# Altium PCB NEW_UI.PcbDoc (part 3 of 4)
Units mm, origin at the board's own origin, x right, y up, seen from the top; angles counter-clockwise.
Board outline 100 x 100 mm, 4 copper layers (SIG/PWR1, GND1, GNS2, SIG/PWR2), stack 1.17 mm thick; 240 components, 215 nets, 917 pads, 445 vias.
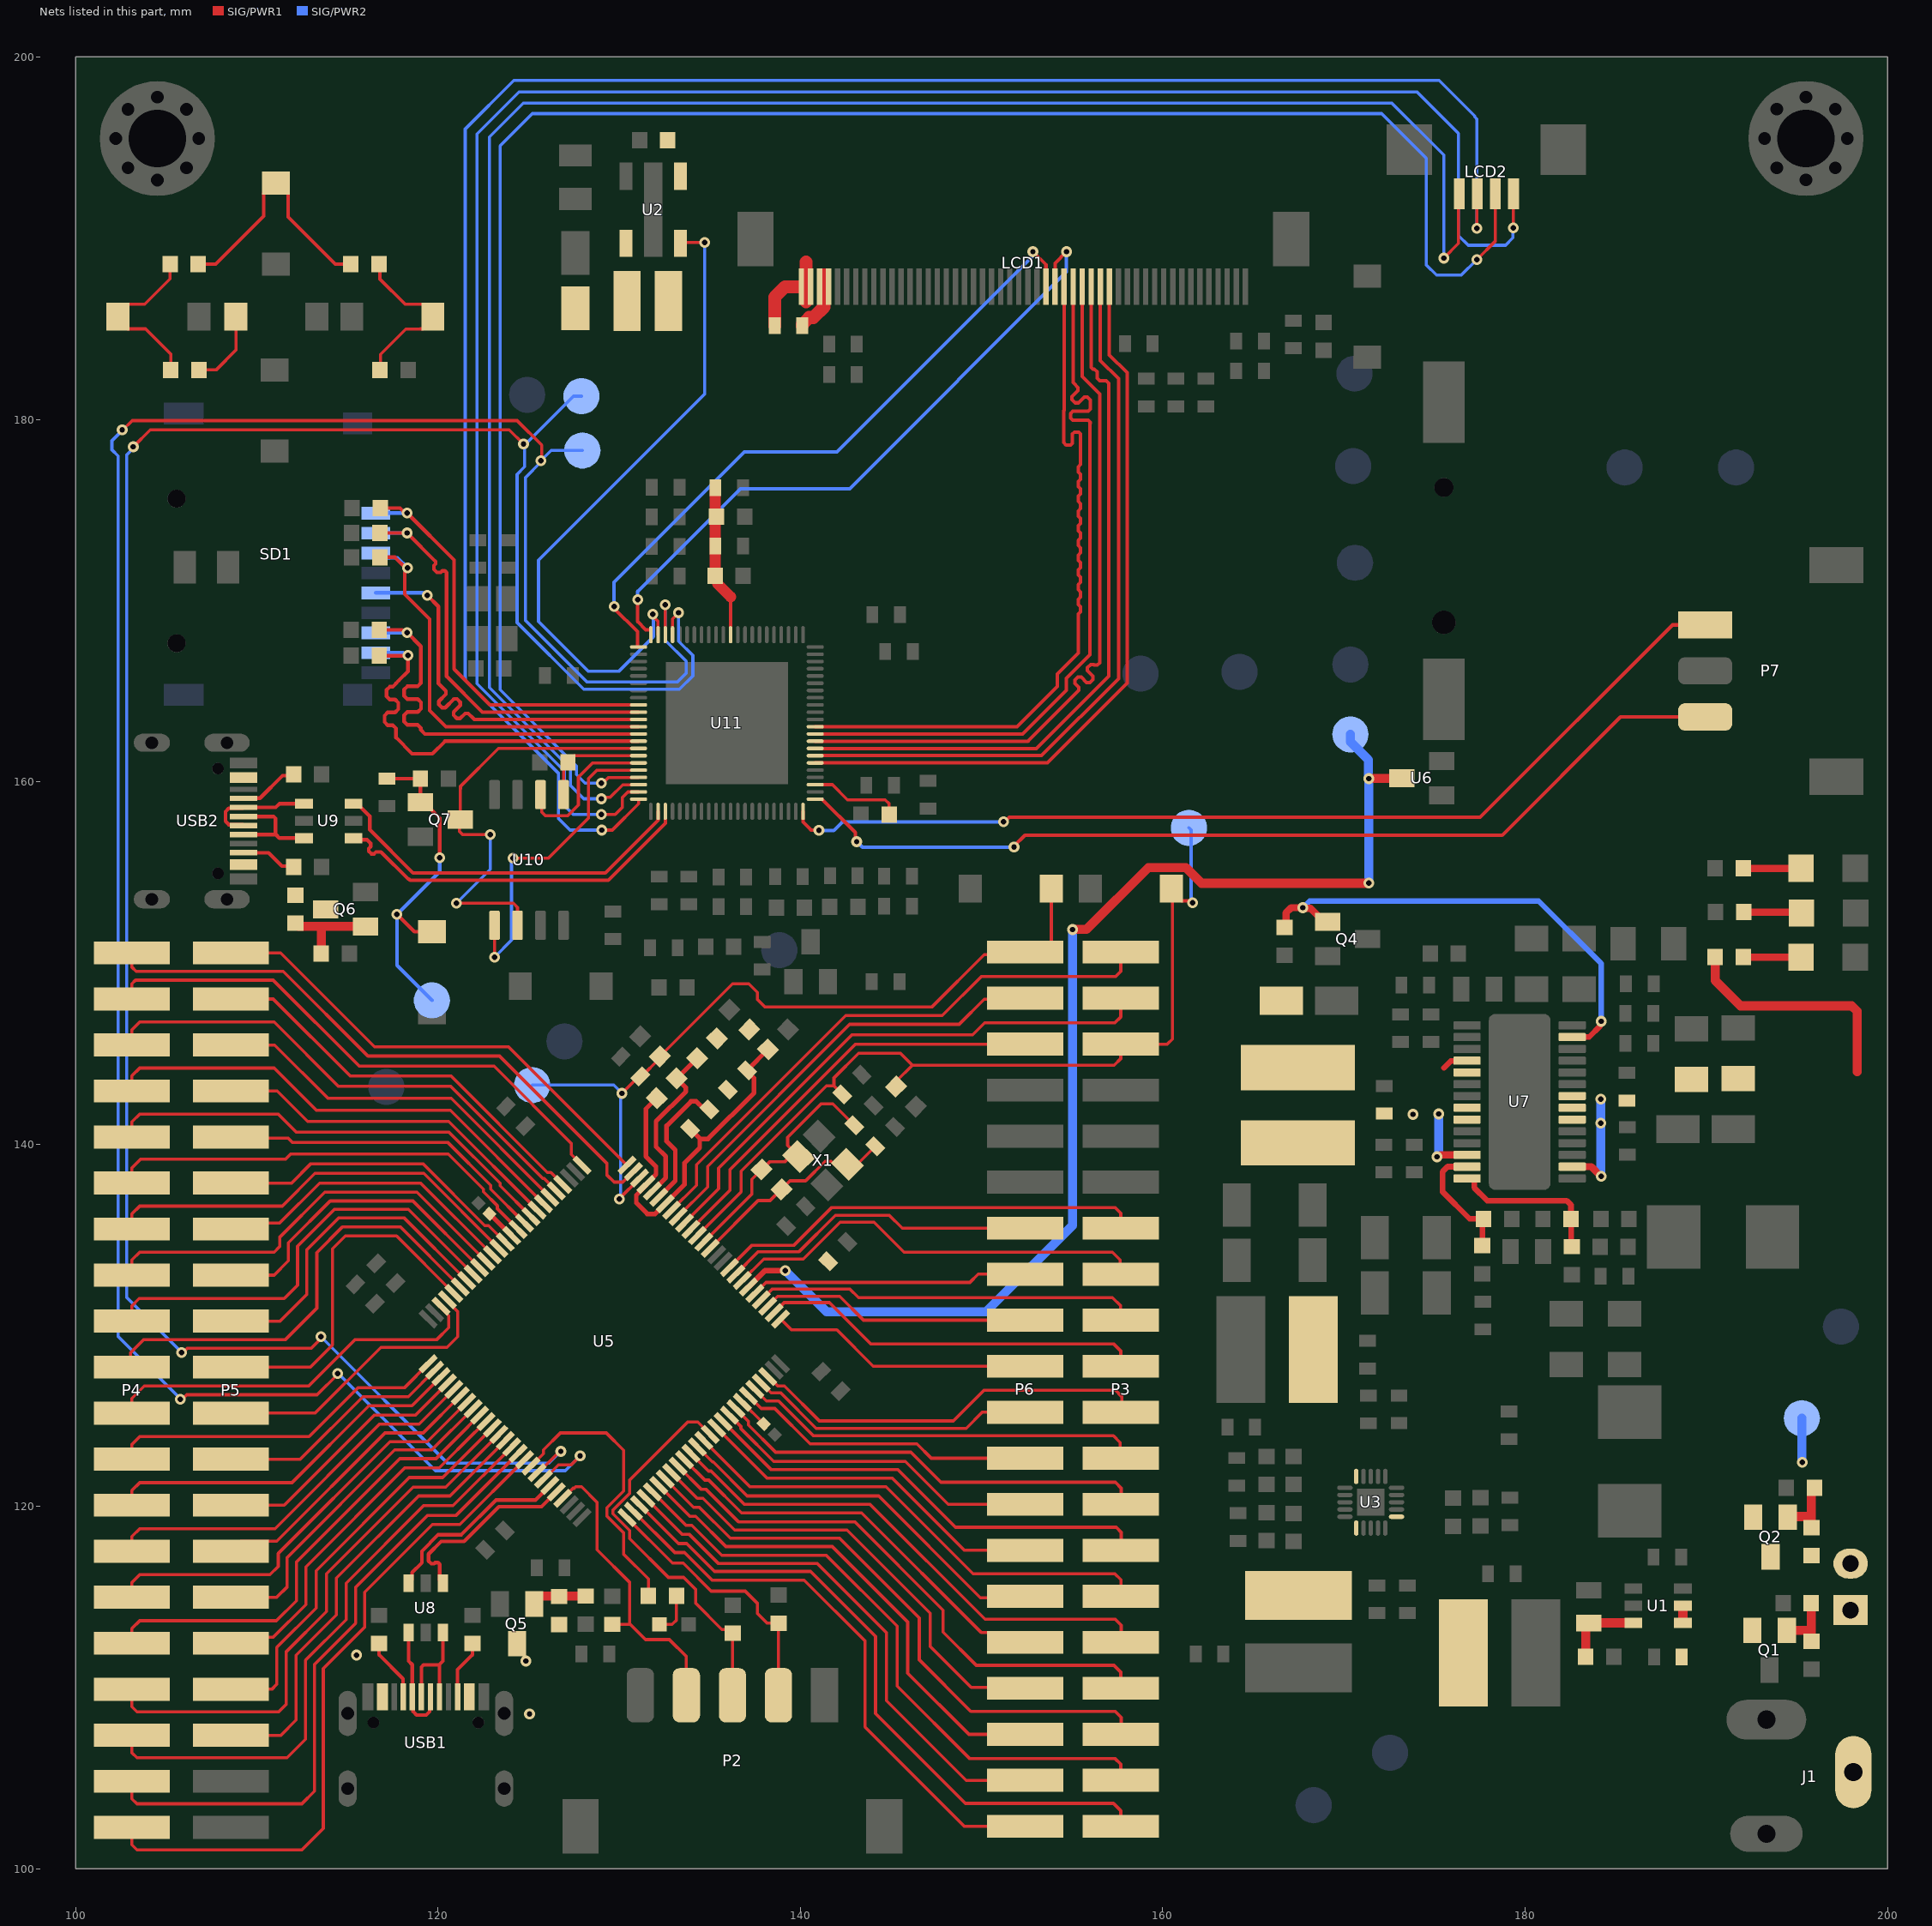
[diagram p5: the nets of this part, all layers, seen from the top]

## Via types
v1: diameter 0.6, hole 0.3, SIG/PWR1 to SIG/PWR2, tented both sides, 431 vias
v2: diameter 0.6, hole 0.3, SIG/PWR1 to SIG/PWR2, tented bottom, 12 vias
v3: diameter 0.6, hole 0.3, SIG/PWR1 to SIG/PWR2, 2 vias

## Nets (pads, with @x,y where several pads share a name; then routed paths per layer and width w, separated by ;. In a path a pad name is that pad's centre, name@x,y a point inside that pad or via, vN(x,y) a via of type N, cw(c..) or ccw(c..) an arc to the next point about the centre after c; other vN are vias at no path point) (continued)
NetC84_2: C84.2 Q7.1 R70.1 SW4.2 TP20.1 | length 18.8
  SIG/PWR1 w0.2: C84.2@117.17,160.172 R70.1@119.024,160.172 119.024,158.87 Q7.1@119.017,158.862 119.401,158.477 119.601,158.477 120.091,157.987 v1(120.091,155.804) ; v1(117.729,152.679) 118.694,151.714 SW4.2@119.659,151.714
  SIG/PWR2 w0.2: TP20.1@119.659,147.93 117.729,149.86 v1(117.729,152.679) 120.091,155.042 v1(120.091,155.804)
NetD1_2: D1.2 L2.1 U2.1
NetD2_2: D2.2 R17.1 | length 2.4
  SIG/PWR1 w0.171: D2.2@132.22,113.487 132.919,113.487 133.16,113.728 R17.1@133.16,115.062
NetD3_2: D3.2 L6.2 U7.4 U7.5 | length 1.5
  SIG/PWR1 w0.308: 175.514,144.196 175.902,144.584 176.784,144.584 U7.4@176.801,144.601
NetD9_2: D9.2 R39.2 | length 3.2
  SIG/PWR1 w0.4: R39.2@192.037,155.219 D9.2@195.223,155.219
NetD10_2: D10.2 R26.2 | length 3.2
  SIG/PWR1 w0.4: R26.2@192.037,150.317 D10.2@195.223,150.317
NetD11_2: D11.2 R28.2 | length 3.2
  SIG/PWR1 w0.4: R28.2@192.062,152.806 195.198,152.806 D11.2@195.248,152.756
NetJ1_3: J1.3 P1.1
NetL3_2: L3.2 U3.11
NetL4_2: L4.2 U3.6
NetL5_2: L5.2 U3.20
NetP7_1: P7.1 U11.88 | length 55.3
  SIG/PWR1 w0.2: U11.88@140.143,158.361 140.143,157.774 140.589,157.328 141.004,157.328 v1(141.021,157.312) ; v1(151.206,157.785) 151.269,157.785 151.523,158.039 177.521,158.039 188.138,168.656 P7.1@189.941,168.656
  SIG/PWR2 w0.2: v1(141.021,157.312) 141.843,157.312 142.316,157.785 v1(151.206,157.785)
NetP7_3: P7.3 U11.1 | length 53.5
  SIG/PWR1 w0.2: U11.1@140.818,159.036 141.193,159.036 143.027,157.202 143.027,156.769 v1(143.104,156.693) ; v1(151.79,156.388) 151.79,156.445 152.393,157.048 178.74,157.048 185.268,163.576 P7.3@189.941,163.576
  SIG/PWR2 w0.2: v1(143.104,156.693) 143.116,156.693 143.421,156.388 v1(151.79,156.388)
NetQ1_1: Q1.1 R2.1 R6.2 | length 3.4
  SIG/PWR1 w0.5: Q1.1@194.447,113.165 195.759,113.165 ; R2.1@195.809,112.56 R6.2@195.809,114.643
NetQ2_1: Q2.1 R3.1 R7.2 | length 3.6
  SIG/PWR1 w0.5: Q2.1@194.447,119.439 195.759,119.439 ; R3.1@195.809,118.834 195.809,120.866 R7.2@195.974,121.031
NetQ4_1: Q4.1 R31.1 U7.27 | length 26.9
  SIG/PWR1 w0.308: U7.27@182.601,145.901 182.604,145.905 183.533,145.905 184.141,146.512 184.141,146.715 v1(184.196,146.771)
  SIG/PWR1 w0.4: R31.1@166.721,151.966 166.802,152.047 166.802,152.756 167.091,153.045 v1(167.737,153.045) 167.775,153.007 168.162,153.007 168.901,152.268 Q4.1@169.101,152.268
  SIG/PWR2 w0.308: v1(167.737,153.045) 168.105,153.413 180.75,153.413 184.196,149.966 v1(184.196,146.771)
NetQ5_1: Q5.1 R41.2 R42.1 | length 3.1
  SIG/PWR1 w0.5: Q5.1@125.308,114.613 125.308,114.8 125.558,115.05 R41.2@126.67,115.05 ; R41.2@126.695,115.05 R42.1@128.143,115.05
NetQ5_3: Q5.3 R41.1 USB1.A4 USB1.B4
  other v1: 125.049,108.539 124.846,111.46 115.499,111.791
NetQ6_1: Q6.1 R50.2 R51.1 | length 5.4
  SIG/PWR1 w0.5: R50.2@112.116,152.184 112.291,152.009 113.563,152.009 ; R51.1@113.551,150.52 113.551,151.996 113.563,152.009 ; Q6.1@115.984,152.009 113.563,152.009
NetQ6_3: Q6.3 R50.1 USB2.A4 USB2.B4
NetR1_1: R1.1 R4.2 U1.3 | length 4.5
  SIG/PWR1 w0.5: R4.2@183.345,111.694 183.352,111.7 183.352,113.567 183.358,113.573 183.362,113.569 185.974,113.569 U1.3@185.978,113.566
NetR18_2: R18.2 U5.94 | length 1.7
  SIG/PWR1 w0.171: U5.94@136.785,125.749 R18.2@137.977,124.557
NetR21_1: R21.1 U5.37 | length 1.7
  SIG/PWR1 w0.254: R21.1@122.834,136.144 122.845,136.144 124.047,134.942 U5.37@124.057,134.942
NetR33_1: R33.1 R35.2 U7.14 | length 8.9
  SIG/PWR1 w0.308: U7.14@176.801,138.101 177.117,138.101 177.188,138.03 177.188,137.594 177.902,136.881 182.296,136.881 182.533,136.643 R35.2@182.533,135.874 182.552,135.855 182.552,134.357 R33.1@182.571,134.338
NetR34_1: R34.1 R36.2 U7.13 | length 7
  SIG/PWR1 w0.308: U7.13@176.801,138.751 175.719,138.751 175.433,138.465 175.433,137.373 176.932,135.874 R36.2@177.643,135.874 ; R34.1@177.643,134.389 R36.2@177.643,135.874 ; R36.2@177.706,135.874 R36.2@177.643,135.874
NetR43_1: R43.1 USB1.B5 | length 3.3
  SIG/PWR1 w0.2: USB1.B5@121.076,109.488 121.076,110.993 121.895,111.811 R43.1@121.895,112.433
NetR44_1: R44.1 USB1.A5 | length 3.5
  SIG/PWR1 w0.2: R44.1@116.738,112.433 116.738,111.811 118.069,110.48 118.069,109.495 USB1.A5@118.076,109.488
NetR52_1: R52.1 USB2.B5 | length 3.1
  SIG/PWR1 w0.2: USB2.B5@109.265,156.08 110.645,156.08 111.379,155.346 111.976,155.346 R52.1@112.026,155.296
NetR53_1: R53.1 USB2.A5 | length 3.3
  SIG/PWR1 w0.2: USB2.A5@109.265,159.08 109.28,159.095 110.175,159.095 111.419,160.339 111.964,160.339 R53.1@112.026,160.401
NetR55_2: R55.2 U11.3 | length 5.1
  SIG/PWR1 w0.171: U11.3@140.818,159.836 141.763,159.836 142.596,159.004 144.678,159.004 144.885,158.798 144.885,158.201 R55.2@144.895,158.191
NetR66_1: R66.1 SW6.1 | length 4.4
  SIG/PWR1 w0.171: R66.1@106.795,182.728 107.747,182.728 108.839,183.82 SW6.1@108.839,185.674
NetR66_2: R66.2 R67.1 SW7.1 | length 9.1
  SIG/PWR1 w0.171: SW7.1@102.324,185.547 102.874,184.998 103.851,184.998 105.245,183.604 R66.2@105.245,182.728 ; SW7.1@102.324,185.801 102.874,186.35 103.001,186.35 103.01,186.36 103.81,186.36 105.207,187.757 R67.1@105.207,188.57
NetR67_2: R67.2 R68.1 SW8.1 | length 13.6
  SIG/PWR1 w0.171: R67.2@106.757,188.57 107.721,188.57 110.372,191.221 110.372,192.491 110.922,193.04 SW8.1@111.049,193.04 111.176,193.04 111.725,192.491 111.725,191.17 114.325,188.57 R68.1@115.185,188.57
NetR68_2: R68.2 R69.1 SW9.1 | length 9.1
  SIG/PWR1 w0.171: R68.2@116.79,188.62 116.79,187.744 118.183,186.35 119.161,186.35 SW9.1@119.71,185.801 ; R69.1@116.828,182.778 116.828,183.591 118.225,184.988 119.024,184.988 119.034,184.998 119.161,184.998 SW9.1@119.71,185.547
PA0: C28.2 P6.20 R27.2 SW2.1 TP17.1 U5.23 | length 44.1
  SIG/PWR1 w0.171: v1(129.997,136.957) 129.997,136.975 131.129,138.106 U5.23@131.129,138.124 ; v1(130.15,142.799) 131.051,143.701 131.204,143.701 132.247,144.744 R27.2@132.247,144.842 136.254,148.849 137.146,148.849 137.62,148.374 137.62,147.977 138.024,147.574 147.269,147.574 150.143,150.448 152.252,150.448 P6.20@152.4,150.597 153.298,150.597 153.848,151.146 SW2.1@153.848,154.102
  SIG/PWR2 w0.171: TP17.1@125.197,143.256 129.692,143.256 v1(130.15,142.799) 130.073,142.723 130.073,137.033 v1(129.997,136.957)
PA1: P4.01 U5.24 | length 34
  SIG/PWR1 w0.171: P4.01@103.099,150.546 103.103,150.542 103.103,149.754 103.327,149.53 111.455,149.53 116.129,144.856 123.393,144.856 129.311,138.938 129.311,138.303 129.718,137.897 130.195,137.897 U5.24@130.775,138.477
PA2: P5.01 U5.25 | length 26.7
  SIG/PWR1 w0.171: P5.01@108.56,150.546 111.303,150.546 116.484,145.364 123.889,145.364 U5.25@130.421,138.831
PA3: P4.02 U5.26 | length 30.4
  SIG/PWR1 w0.171: P4.02@103.099,148.006 103.099,148.844 103.302,149.047 110.896,149.047 115.646,144.297 123.088,144.297 127.356,140.03 127.356,139.422 U5.26@127.947,138.831
PA4: P5.02 U5.29 | length 22.6
  SIG/PWR1 w0.171: P5.02@108.56,148.006 110.896,148.006 115.138,143.764 120.701,143.764 126.035,138.43 126.227,138.43 U5.29@126.886,137.77
PA5: P4.03 U5.30 | length 28.3
  SIG/PWR1 w0.171: P4.03@103.099,145.466 103.099,146.304 103.53,146.736 110.947,146.736 114.503,143.18 120.701,143.18 125.781,138.1 125.85,138.1 U5.30@126.532,137.417
PA6: P5.03 U5.31 | length 21.1
  SIG/PWR1 w0.171: P5.03@108.56,145.466 110.973,145.466 113.919,142.519 120.723,142.519 U5.31@126.179,137.063
PA7: P4.04 U5.32 | length 26.8
  SIG/PWR1 w0.171: P4.04@103.099,142.926 103.099,143.764 103.53,144.196 110.947,144.196 113.284,141.859 120.676,141.859 U5.32@125.826,136.71
PA15: P6.01 U5.77 | length 31.6
  SIG/PWR1 w0.171: U5.77@130.775,119.739 133.065,117.45 133.604,117.45 135.128,115.926 140.208,115.926 143.561,112.573 143.561,107.823 149.047,102.337 P6.01@152.4,102.337
PB0: P5.05 U5.35 | length 18.3
  SIG/PWR1 w0.171: P5.05@108.56,140.386 108.62,140.326 111.723,140.326 111.967,140.081 120.548,140.081 122.911,137.719 122.911,137.503 U5.35@124.765,135.649
PB1: P4.06 U5.36 | length 24.4
  SIG/PWR1 w0.171: P4.06@103.099,137.846 103.099,138.684 103.581,139.167 111.582,139.167 111.862,139.446 120.564,139.446 122.497,137.513 122.497,137.369 123.272,136.593 123.272,136.434 U5.36@124.411,135.295
PB4: P6.07 U5.90 | length 19.8
  SIG/PWR1 w0.171: U5.90@135.371,124.335 138.142,121.564 145.059,121.564 149.047,117.577 P6.07@152.4,117.577
PB5: P3.07 U5.91 | length 25.5
  SIG/PWR1 w0.171: U5.91@135.725,124.689 138.392,122.022 145.39,122.022 148.565,118.847 157.429,118.847 157.709,118.567 157.709,117.602 P3.07@157.683,117.577
PB6: P6.08 U5.92 | length 18.4
  SIG/PWR1 w0.171: U5.92@136.078,125.042 136.712,124.409 136.712,124.295 138.528,122.479 145.796,122.479 148.158,120.117 P6.08@152.4,120.117
PB7: P3.08 U5.93 | length 24.1
  SIG/PWR1 w0.171: U5.93@136.432,125.396 137.135,124.694 137.135,124.485 138.633,122.987 146.101,122.987 147.754,121.334 157.381,121.334 157.709,121.006 157.709,120.142 P3.08@157.683,120.117
PB8: P6.09 U5.95 | length 16.7
  SIG/PWR1 w0.171: U5.95@137.139,126.103 137.842,125.401 138.582,125.401 140.538,123.444 146.431,123.444 147.218,122.657 P6.09@152.4,122.657
PB9: P3.09 U5.96 | length 22.3
  SIG/PWR1 w0.171: U5.96@137.493,126.457 138.126,125.823 138.794,125.823 140.716,123.901 157.277,123.901 157.654,123.524 157.654,122.686 P3.09@157.683,122.657
PB10: P5.11 U5.47 | length 16.5
  SIG/PWR1 w0.171: P5.11@108.56,125.146 113.208,125.146 116.84,128.778 120.498,128.778 121.082,129.362 121.082,130.754 120.522,131.313 U5.47@120.522,131.406
PB11: P4.11 U5.48 | length 21.3
  SIG/PWR1 w0.171: P4.11@103.099,125.146 103.099,125.959 103.784,126.644 112.862,126.644 115.427,129.21 119.939,129.21 120.59,129.861 120.59,130.526 120.169,130.948 U5.48@120.169,131.053
PB12: P4.12 U5.51 | length 19
  SIG/PWR1 w0.171: P4.12@103.099,122.606 103.099,123.419 103.53,123.85 112.878,123.85 115.57,126.543 118.134,126.543 U5.51@119.461,127.871
PB13: P5.12 U5.52 | length 13.3
  SIG/PWR1 w0.171: P5.12@108.56,122.606 112.395,122.606 115.849,126.06 118.358,126.06 U5.52@119.815,127.517
PB14: P4.13 U5.53 | length 20.5
  SIG/PWR1 w0.171: P4.13@103.099,120.066 103.099,120.879 103.53,121.31 111.938,121.31 116.18,125.552 118.557,125.552 U5.53@120.169,127.164
PB15: P5.13 U5.54 | length 14.8
  SIG/PWR1 w0.171: P5.13@108.56,120.066 111.506,120.066 116.484,125.044 118.756,125.044 U5.54@120.522,126.81
PC0: P6.18 U5.15 | length 23.3
  SIG/PWR1 w0.171: U5.15@133.957,135.295 136.119,137.457 136.119,138.595 143.041,145.517 P6.18@152.4,145.517
PC1: P3.19 U5.16 | length 30.5
  SIG/PWR1 w0.171: U5.16@133.603,135.649 135.484,137.529 135.484,138.667 142.841,146.025 149.504,146.025 150.165,146.685 157.353,146.685 157.683,147.015 P3.19@157.683,148.057
PC2: P6.19 U5.17 | length 24.8
  SIG/PWR1 w0.171: U5.17@133.25,136.002 134.874,137.626 134.874,138.764 142.719,146.609 148.763,146.609 150.143,147.989 152.333,147.989 P6.19@152.4,148.057
PC3: P3.20 U5.18 | length 32
  SIG/PWR1 w0.171: U5.18@132.897,136.356 134.264,137.724 134.264,138.862 142.494,147.091 147.828,147.091 149.987,149.25 157.404,149.25 157.683,149.53 P3.20@157.683,150.597
PC4: P5.04 U5.33 | length 19.6
  SIG/PWR1 w0.171: P5.04@108.56,142.926 111.125,142.926 112.801,141.249 120.579,141.249 U5.33@125.472,136.356
PC5: P4.05 U5.34 | length 25.5
  SIG/PWR1 w0.171: P4.05@103.099,140.386 103.099,141.224 103.53,141.656 111.176,141.656 112.183,140.649 120.616,140.649 123.419,137.846 123.419,137.702 U5.34@125.118,136.002
PC6: P5.18 U5.63 | length 25.2
  SIG/PWR1 w0.171: P5.18@108.56,107.366 111.328,107.366 112.166,108.204 112.166,111.785 114.389,114.008 114.389,116.04 118.923,120.574 120.65,120.574 U5.63@123.704,123.628
PC7: P4.18 U5.64 | length 32.9
  SIG/PWR1 w0.171: P4.18@103.099,107.366 103.099,106.401 103.378,106.121 111.658,106.121 112.674,107.137 112.674,111.506 114.922,113.754 114.922,115.76 119.202,120.04 120.824,120.04 U5.64@124.057,123.275
PC8: P4.19 U5.65 | length 35.7
  SIG/PWR1 w0.171: P4.19@103.099,104.826 103.099,103.861 103.378,103.581 112.483,103.581 113.182,104.281 113.182,111.277 115.456,113.551 115.456,115.532 119.431,119.507 120.997,119.507 U5.65@124.411,122.921
PC9: P4.20 U5.66 | length 38
  SIG/PWR1 w0.171: P4.20@103.099,102.286 103.099,101.321 103.378,101.041 112.483,101.041 113.665,102.224 113.665,111.049 115.951,113.335 115.951,115.265 119.685,118.999 121.197,118.999 U5.66@124.765,122.567
PC10: P3.01 U5.78 | length 36.9
  SIG/PWR1 w0.171: U5.78@131.129,120.093 133.272,117.95 133.714,117.95 135.255,116.408 135.428,116.408 135.429,116.41 137.062,116.41 137.063,116.408 140.564,116.408 144.145,112.827 144.145,108.56 149.098,103.607 157.277,103.607 157.683,103.2 P3.01@157.683,102.337
PC11: P6.02 U5.79 | length 29.6
  SIG/PWR1 w0.171: U5.79@131.482,120.446 133.479,118.45 133.874,118.45 135.484,116.84 140.945,116.84 144.755,113.03 144.755,109.271 149.149,104.877 P6.02@152.4,104.877
PC12: P3.02 U5.80 | length 34.9
  SIG/PWR1 w0.171: U5.80@131.836,120.8 133.686,118.95 134.005,118.95 135.657,117.297 141.427,117.297 145.339,113.386 145.339,110.084 149.352,106.07 157.378,106.07 157.683,105.766 P3.02@157.683,104.877
PC13: P3.13 U5.7 | length 23.9
  SIG/PWR1 w0.171: U5.7@136.756,132.433 137.978,133.655 140.157,133.655 142.189,135.687 144.069,135.687 145.72,134.036 157.224,134.036 157.651,133.608 157.651,132.848 P3.13@157.683,132.817
PC14: P6.14 U5.8 | length 17.7
  SIG/PWR1 w0.171: U5.8@136.403,132.787 137.677,134.061 139.929,134.061 141.935,136.068 144.907,136.068 145.618,135.357 P6.14@152.4,135.357
PC15: P3.14 U5.9 | length 24
  SIG/PWR1 w0.171: U5.9@136.049,133.14 137.326,134.417 139.649,134.417 141.732,136.5 157.366,136.5 157.683,136.182 P3.14@157.683,135.357
PD0: P6.03 U5.81 | length 27.6
  SIG/PWR1 w0.171: U5.81@132.189,121.153 133.893,119.45 134.212,119.45 135.882,117.78 141.757,117.78 145.923,113.614 145.923,110.795 149.301,107.417 P6.03@152.4,107.417
PD1: P3.03 U5.82 | length 32.9
  SIG/PWR1 w0.171: U5.82@132.543,121.507 134.1,119.95 134.419,119.95 136.13,118.238 142.162,118.238 146.558,113.843 146.558,111.531 149.403,108.687 157.378,108.687 157.709,108.356 157.709,107.442 P3.03@157.683,107.417
PD2: P6.04 U5.83 | length 25.5
  SIG/PWR1 w0.171: U5.83@132.932,121.816 134.305,120.443 134.624,120.443 136.372,118.694 142.57,118.694 147.168,114.097 147.168,112.268 149.428,110.007 152.349,110.007 P6.04@152.4,109.957
PD3: P3.04 U5.84 | length 30.7
  SIG/PWR1 w0.171: U5.84@133.25,122.214 134.515,120.95 134.778,120.95 136.576,119.151 143.002,119.151 147.879,114.275 147.879,113.055 149.708,111.227 157.302,111.227 157.683,110.846 P3.04@157.683,109.957
PD4: P6.05 U5.85 | length 23
  SIG/PWR1 w0.171: U5.85@133.603,122.567 134.722,121.45 134.938,121.45 136.754,119.634 143.383,119.634 149.971,113.046 151.851,113.046 P6.05@152.4,112.497
PD5: P3.05 U5.86 | length 28.6
  SIG/PWR1 w0.171: U5.86@133.957,122.921 134.929,121.95 135.073,121.95 136.906,120.117 143.84,120.117 150.19,113.767 157.378,113.767 157.709,113.436 157.709,112.522 P3.05@157.683,112.497
PD6: P6.06 U5.87 | length 21.6
  SIG/PWR1 w0.171: U5.87@134.311,123.275 135.136,122.45 135.183,122.45 137.058,120.574 144.323,120.574 149.936,114.96 152.324,114.96 P6.06@152.4,115.037
PD7: P3.06 U5.88 | length 27.1
  SIG/PWR1 w0.171: U5.88@134.664,123.628 137.211,121.082 144.729,121.082 149.53,116.281 157.353,116.281 157.688,115.946 157.688,115.042 P3.06@157.683,115.037
PD8: P4.14 U5.55 | length 22
  SIG/PWR1 w0.171: P4.14@103.099,117.526 103.099,118.339 103.53,118.77 110.998,118.77 116.764,124.536 118.956,124.536 U5.55@120.875,126.457
PD9: P5.14 U5.56 | length 16.2
  SIG/PWR1 w0.171: P5.14@108.56,117.526 109.109,118.075 111.09,118.075 117.069,124.054 119.18,124.054 U5.56@121.229,126.103
PD10: P4.15 U5.57 | length 23.8
  SIG/PWR1 w0.171: P4.15@103.099,114.986 103.099,115.799 103.53,116.23 110.719,116.23 111.176,116.688 111.176,117.399 117.348,123.571 119.405,123.571 U5.57@121.583,125.749
PD11: P5.15 U5.58 | length 18.6
  SIG/PWR1 w0.171: P5.15@108.56,114.986 111.1,114.986 111.671,115.557 111.671,117.183 117.602,123.114 119.654,123.114 U5.58@121.937,125.396
PD12: P4.16 U5.59 | length 26.1
  SIG/PWR1 w0.171: P4.16@103.099,112.446 103.099,113.259 103.53,113.69 111.074,113.69 112.179,114.795 112.179,116.929 117.881,122.631 119.888,122.631 121.641,124.384 121.641,124.393 U5.59@122.29,125.042
PD13: P5.16 U5.60 | length 20.4
  SIG/PWR1 w0.171: P5.16@108.56,112.446 108.886,112.772 110.892,112.772 112.7,114.579 112.7,116.662 118.161,122.123 120.066,122.123 122.045,124.103 122.057,124.103 U5.60@122.643,124.689
PD14: P5.17 U5.61 | length 22.8
  SIG/PWR1 w0.171: P5.17@108.56,109.906 110.82,109.906 111.1,110.185 111.1,112.217 113.271,114.389 113.271,116.446 118.415,121.59 120.252,121.59 U5.61@122.997,124.335
PD15: P4.17 U5.62 | length 30.6
  SIG/PWR1 w0.171: P4.17@103.099,109.906 103.099,108.941 103.378,108.661 111.201,108.661 111.608,109.068 111.608,111.963 113.843,114.198 113.843,116.281 118.618,121.056 120.425,121.056 U5.62@123.35,123.982
PE0: P6.10 U5.97 | length 16
  SIG/PWR1 w0.171: U5.97@137.846,126.81 137.846,126.796 138.379,126.263 138.913,126.263 140.868,124.308 149.149,124.308 150.038,125.197 P6.10@152.4,125.197
PE1: P3.10 U5.98 | length 22.3
  SIG/PWR1 w0.171: U5.98@138.2,127.164 138.232,127.164 138.751,126.644 139.116,126.644 141.046,124.714 148.438,124.714 150.139,126.416 157.387,126.416 157.734,126.069 157.734,125.247 P3.10@157.683,125.197
PE2: P6.11 U5.1 | length 14.9
  SIG/PWR1 w0.171: U5.1@138.907,130.346 139.51,129.743 142.011,129.743 144.018,127.737 P6.11@152.4,127.737 P6.11@152.724,127.737
PE3: P3.11 U5.2 | length 21.3
  SIG/PWR1 w0.171: U5.2@138.554,130.699 139.102,131.248 141.599,131.248 143.891,128.956 157.302,128.956 157.683,128.575 P3.11@157.683,127.737
PE4: P6.12 U5.3 | length 15
  SIG/PWR1 w0.171: U5.3@138.2,131.053 138.204,131.053 138.737,131.586 142.175,131.586 143.485,130.277 P6.12@152.4,130.277
PE5: P3.12 U5.4 | length 21.3
  SIG/PWR1 w0.171: U5.4@137.846,131.406 138.438,131.998 142.729,131.998 143.205,131.521 157.226,131.521 157.679,131.068 157.679,130.281 P3.12@157.683,130.277
PE6: P6.13 U5.5 | length 15.3
  SIG/PWR1 w0.171: U5.5@137.493,131.76 138.092,132.359 149.352,132.359 149.809,132.817 P6.13@152.4,132.817
PE7: P5.06 U5.38 | length 17.4
  SIG/PWR1 w0.171: P5.06@108.56,137.846 111.912,137.846 112.979,138.913 119.161,138.913 122.574,135.5 122.793,135.5 U5.38@123.704,134.588
PE8: P4.07 U5.39 | length 23.7
  SIG/PWR1 w0.171: P4.07@103.099,135.306 103.099,136.144 103.53,136.576 111.404,136.576 113.208,138.379 119.206,138.379 U5.39@123.35,134.235
PE9: P5.07 U5.40 | length 17.1
  SIG/PWR1 w0.171: P5.07@108.56,135.306 108.89,135.636 111.252,135.636 113.462,137.846 119.033,137.846 U5.40@122.997,133.881
PE10: P4.08 U5.41 | length 23.8
  SIG/PWR1 w0.171: P4.08@103.099,132.766 103.099,133.604 103.53,134.036 110.947,134.036 111.252,134.341 111.252,134.849 113.741,137.338 118.833,137.338 U5.41@122.643,133.528
PE11: P5.08 U5.42 | length 17.5
  SIG/PWR1 w0.171: P5.08@108.56,132.766 110.947,132.766 111.735,133.553 111.735,134.544 114.046,136.855 118.609,136.855 U5.42@122.29,133.174
PE12: P4.09 U5.43 | length 24.6
  SIG/PWR1 w0.171: P4.09@103.099,130.226 103.099,131.064 103.505,131.47 111.506,131.47 112.243,132.207 112.243,134.366 114.275,136.398 118.359,136.398 U5.43@121.937,132.821
PE13: P5.09 U5.44 | length 18.3
  SIG/PWR1 w0.171: P5.09@108.56,130.226 111.277,130.226 112.751,131.699 112.751,134.163 114.503,135.915 118.135,135.915 U5.44@121.583,132.467
PE14: P4.10 U5.45 | length 25.1
  SIG/PWR1 w0.171: P4.10@103.099,127.686 103.027,127.758 103.027,128.477 103.759,129.21 111.582,129.21 113.309,130.937 113.309,134.01 114.732,135.433 117.91,135.433 U5.45@121.229,132.113
PE15: P5.10 U5.46 | length 19.7
  SIG/PWR1 w0.171: P5.10@108.56,127.686 112.954,127.686 114.178,128.91 114.178,134.22 114.888,134.929 117.706,134.929 U5.46@120.875,131.76
PRE_USB1_N: U8.1 USB1.A7 USB1.B7 | length 6.4
  SIG/PWR1 w0.2: U8.1@118.369,113.03 118.369,111.468 118.576,111.261 USB1.B7@118.576,109.488 118.626,109.438 118.626,108.668 118.808,108.486 119.345,108.486 119.526,108.668 119.526,109.438 USB1.A7@119.576,109.488
PRE_USB1_P: U8.3 USB1.A6 USB1.B6 | length 6.3
  SIG/PWR1 w0.2: USB1.A6@119.076,109.488 119.076,111.135 119.194,111.252 120.06,111.252 120.076,111.268 ; USB1.B6@120.076,109.488 120.076,111.268 ; U8.3@120.269,113.03 120.269,111.461 120.076,111.268
PRE_USB2_N: U9.1 USB2.A7 USB2.B7 | length 6.4
  SIG/PWR1 w0.2: USB2.A7@109.265,157.58 109.215,157.63 108.445,157.63 108.263,157.812 108.263,158.348 108.445,158.53 109.215,158.53 USB2.B7@109.265,158.58 111.038,158.58 111.246,158.787 U9.1@112.807,158.787
PRE_USB2_P: U9.3 USB2.A6 USB2.B6 | length 6.3
  SIG/PWR1 w0.2: USB2.B6@109.265,157.08 111.046,157.08 ; USB2.A6@109.265,158.08 110.912,158.08 111.029,157.963 111.029,157.096 111.046,157.08 ; U9.3@112.807,156.887 111.238,156.887 111.046,157.08
PWM: U2.3 U11.43 | length 36.9
  SIG/PWR1 w0.171: v1(131.851,169.24) 131.851,169.135 132.143,168.843 U11.43@132.143,168.111 ; U2.3@133.377,189.717 133.423,189.763 v1(134.722,189.763)
  SIG/PWR2 w0.171: v1(131.851,169.24) 131.889,169.203 131.889,168.007 129.972,166.091 128.295,166.091 125.541,168.845 125.541,172.227 134.722,181.407 v1(134.722,189.763)
R0: LCD1.28 U11.45 | length 37.2
  SIG/PWR1 w0.191: v1(129.718,169.672) 129.718,169.577 131.01,168.284 131.01,167.441 131.063,167.441 U11.45@131.068,167.436 ; v1(152.832,189.255) 153.553,188.534 LCD1.28@153.553,187.325
  SIG/PWR2 w0.191: v1(129.718,169.672) 129.718,171.018 136.906,178.206 142.011,178.206 152.755,188.95 152.755,189.179 v1(152.832,189.255)
R1: LCD1.29 U11.44 | length 37.1
  SIG/PWR1 w0.191: v1(131.018,170.043) 131.004,170.029 131.004,168.843 131.465,168.382 131.738,168.382 131.743,168.378 U11.44@131.743,168.111 ; LCD1.29@154.053,187.325 154.053,188.623 v1(154.686,189.255)
  SIG/PWR2 w0.191: v1(131.018,170.043) 131.018,170.499 136.693,176.174 142.723,176.174 154.686,188.138 v1(154.686,189.255)
R2: LCD1.30 U11.11 | length 40
  SIG/PWR1 w0.191: U11.11@140.818,163.036 151.962,163.036 154.178,165.253 154.178,165.938 155.334,167.094 155.334,169.253 155.461,169.38 155.461,169.659 155.334,169.786 155.334,170.066 155.461,170.193 155.461,170.472 155.334,170.599 155.334,170.879 155.461,171.005 155.461,171.285 155.334,171.412 155.334,171.691 155.461,171.818 155.461,172.098 155.334,172.225 155.334,172.504 155.461,172.631 155.461,172.91 155.334,173.037 155.334,173.317 155.461,173.444 155.461,173.723 155.334,173.85 155.334,174.13 155.461,174.257 155.461,174.536 155.334,174.663 155.334,174.942 155.461,175.07 155.461,175.349 155.334,175.476 155.334,175.755 155.461,175.882 155.461,176.162 155.334,176.289 155.334,176.568 155.461,176.695 155.461,176.975 155.334,177.101 155.334,177.381 155.464,177.511 155.464,177.811 155.461,177.814 155.461,179.198 155.36,179.299 155.117,179.299 155.016,179.198 155.016,178.688 154.916,178.587 154.665,178.587 154.529,178.723 154.529,180.483 154.553,180.508 LCD1.30@154.553,187.325
R3: LCD1.31 U11.10 | length 41.1
  SIG/PWR1 w0.191: U11.10@140.818,162.636 152.273,162.636 154.686,165.049 154.686,165.71 155.981,167.005 155.981,179.735 155.981,179.761 156.007,179.786 156.007,179.831 155.884,179.953 155.043,179.953 154.92,180.076 154.92,180.321 155.043,180.444 155.884,180.444 156.007,180.567 156.007,180.88 156.007,181.077 155.911,181.172 155.843,181.24 155.67,181.24 155.342,180.912 155.169,180.912 154.995,181.086 154.995,181.26 155.323,181.587 155.323,181.761 155.093,181.99 155.053,182.03 155.053,182.085 LCD1.31@155.053,187.325
R4: LCD1.32 U11.9 | length 40.4
  SIG/PWR1 w0.191: U11.9@140.818,162.236 152.559,162.236 155.296,164.973 155.363,165.04 155.363,165.214 155.148,165.429 155.148,165.602 155.322,165.776 155.495,165.776 155.8,165.471 155.973,165.471 156.147,165.645 156.147,165.818 155.842,166.123 155.842,166.296 156.016,166.47 156.189,166.47 156.219,166.441 156.392,166.441 156.515,166.564 156.515,166.728 156.515,181.407 155.553,182.368 LCD1.32@155.553,187.325
R5: LCD1.33 U11.8 | length 40
  SIG/PWR1 w0.191: U11.8@140.818,161.836 153.023,161.836 157.023,165.837 157.023,181.98 156.87,182.132 156.531,182.132 156.379,182.285 156.379,182.624 156.227,182.776 156.154,182.776 156.053,182.876 LCD1.33@156.053,187.325
R6: LCD1.34 U11.7 | length 40.6
  SIG/PWR1 w0.191: U11.7@140.818,161.436 140.819,161.438 144.396,161.438 144.401,161.443 153.315,161.443 157.556,165.684 157.556,182.245 156.553,183.248 LCD1.34@156.553,187.325
R7: LCD1.35 U11.6 | length 41.3
  SIG/PWR1 w0.191: U11.6@140.818,161.036 141.525,161.036 141.536,161.047 144.558,161.047 144.563,161.052 153.635,161.052 158.039,165.456 158.039,182.575 157.053,183.561 LCD1.35@157.053,187.325
RX: TP22.1 U5.69 U11.42 | length 136
  SIG/PWR1 w0.171: v1(102.565,179.426) 102.605,179.426 103.113,179.933 124.363,179.933 125.719,178.577 125.719,177.764 v1(125.679,177.724) ; v1(105.766,125.908) 105.866,125.908 106.12,126.162 113.324,126.162 114.452,127.29 v1(114.452,127.33) ; U5.69@125.825,121.507 125.865,121.507 126.649,122.29 127.345,122.29 v1(127.838,122.784) ; v1(132.537,169.774) 132.537,169.093 132.543,169.088 132.543,168.806 132.537,168.801 132.537,168.117 U11.42@132.543,168.111
  SIG/PWR2 w0.171: v1(102.565,179.426) 102.565,179.386 101.996,178.816 101.996,178.319 102.337,177.978 102.337,129.377 105.766,125.948 v1(105.766,125.908) ; v1(114.452,127.33) 114.492,127.33 119.852,121.971 127.025,121.971 v1(127.838,122.784) ; TP22.1@127.965,178.283 126.238,178.283 v1(125.679,177.724) 125.679,177.644 124.821,176.786 124.821,168.905 128.219,165.506 133.212,165.506 133.695,165.989 133.695,166.649 132.537,167.807 v1(132.537,169.774)
SD_CK: SD1.5 U11.55 | length 22.4
  SIG/PWR1 w0.2: v1(119.405,170.282) 120.015,169.672 120.015,165.691 120.015,165.423 120.431,165.008 120.431,164.831 120.04,164.441 120.04,164.264 120.217,164.087 120.394,164.087 120.874,164.567 121.051,164.567 121.227,164.39 121.227,164.214 120.861,163.847 120.861,163.67 121.038,163.493 121.214,163.493 121.491,163.77 121.668,163.77 121.918,163.52 121.989,163.449 122.002,163.436 U11.55@131.068,163.436
  SIG/PWR2 w0.2: SD1.5@116.562,170.432 119.139,170.432 119.289,170.282 v1(119.405,170.282)
SD_CMD: R49.1 SD1.3 U11.56 | length 24.3
  SIG/PWR1 w0.2: R49.1@116.777,172.39 117.613,172.39 118.197,171.806 v1(118.313,171.806) 118.313,171.69 118.161,171.537 118.161,170.348 119.532,168.976 119.532,164.668 119.529,164.665 119.529,163.935 120.428,163.036 U11.56@131.068,163.036
  SIG/PWR2 w0.2: SD1.3@116.562,172.62 116.827,172.356 117.763,172.356 v1(118.313,171.806)
SD_D0: R45.1 SD1.7 U11.57 | length 24
  SIG/PWR1 w0.2: R45.1@116.751,168.377 118.027,168.377 118.172,168.232 v1(118.288,168.232) 119.05,167.47 119.05,165.811 119.05,165.443 118.873,165.266 118.298,165.266 118.121,165.089 118.121,164.735 118.298,164.558 118.883,164.558 119.06,164.381 119.06,164.027 118.883,163.85 118.3,163.85 118.123,163.673 118.123,163.319 118.3,163.142 118.873,163.142 119.05,162.965 119.05,162.865 119.278,162.636 U11.57@131.068,162.636
  SIG/PWR2 w0.2: SD1.7@116.574,168.232 v1(118.288,168.232)
SD_D1: R46.1 SD1.8 U11.58 | length 24
  SIG/PWR1 w0.2: R46.1@116.751,166.954 118.313,166.954 v1(118.339,166.98) 118.339,166.091 117.812,165.564 117.678,165.43 117.678,165.418 117.501,165.241 117.331,165.241 117.154,165.064 117.154,164.71 117.331,164.533 117.628,164.533 117.805,164.356 117.805,164.002 117.628,163.825 117.219,163.825 117.042,163.648 117.042,163.294 117.219,163.117 117.501,163.117 117.678,162.94 117.678,162.84 117.678,162.433 118.567,161.544 119.685,161.544 120.377,162.236 U11.58@131.068,162.236
  SIG/PWR2 w0.2: SD1.8@116.574,167.132 118.07,167.132 118.223,166.98 v1(118.339,166.98)
SD_D2: R47.1 SD1.1 U11.53 | length 24
  SIG/PWR1 w0.2: R47.1@116.802,175.108 117.896,175.108 118.172,174.832 v1(118.288,174.832) 120.879,172.241 120.879,166.218 122.86,164.236 U11.53@131.068,164.236
  SIG/PWR2 w0.2: SD1.1@116.562,174.82 116.574,174.832 v1(118.288,174.832)
SD_D3: R48.1 SD1.2 U11.54 | length 23.9
  SIG/PWR1 w0.2: R48.1@116.777,173.736 116.781,173.732 v1(118.288,173.732) 119.867,172.153 119.867,172.026 119.774,171.934 119.774,171.723 119.939,171.559 120.149,171.559 120.23,171.639 120.372,171.639 120.472,171.539 120.472,165.811 122.447,163.836 U11.54@131.068,163.836
  SIG/PWR2 w0.2: SD1.2@116.562,173.72 116.574,173.732 v1(118.288,173.732)
SPI_MISO: U10.2 U11.61 | length 8.5
  SIG/PWR1 w0.171: U10.2@125.654,159.283 125.726,159.211 125.726,158.322 125.933,158.115 127.144,158.115 127.743,158.714 127.743,160.255 128.524,161.036 U11.61@131.068,161.036
SPI_MOSI: U10.5 U11.62 | length 17.9
  SIG/PWR1 w0.171: v1(123.114,150.317) U10.5@123.114,152.073 ; v1(124.13,155.778) 126.086,155.778 128.295,157.988 128.295,160.172 128.759,160.636 U11.62@131.068,160.636
  SIG/PWR2 w0.171: v1(123.114,150.317) 124.054,151.257 124.054,155.702 v1(124.13,155.778)
SPI_NSS: R54.1 U10.1 U11.60 | length 6
  SIG/PWR1 w0.171: U10.1@126.924,159.283 126.924,160.82 R54.1@127.165,161.061 127.165,161.086 127.505,161.426 127.53,161.426 127.54,161.436 U11.60@131.068,161.436
SPI_SCK: Q7.3 U10.6 U11.59 | length 24
  SIG/PWR1 w0.171: v1(121.006,153.289) 124.159,153.289 124.384,153.064 U10.6@124.384,152.073 ; v1(122.885,157.074) 121.361,157.074 121.18,157.255 121.18,157.875 Q7.3@121.217,157.912 121.217,159.603 121.237,159.624 121.237,159.743 123.33,161.836 U11.59@131.068,161.836
  SIG/PWR2 w0.171: v1(121.006,153.289) 122.885,155.168 v1(122.885,157.074)
STM_OSC_IN: C22.2 R19.2 U5.13 X1.1 | length 13.9
  SIG/PWR1 w0.171: U5.13@134.664,134.588 137.312,137.236 137.312,138.053 R19.2@137.857,138.597 ; R19.2@137.857,138.597 137.88,138.597 138.297,139.014 139.126,139.014 139.413,139.302 X1.1@139.909,139.302 139.294,139.917 139.294,140.376 141.137,142.219 141.793,142.219 C22.2@142.971,141.041
STM_OSC_OUT: C23.2 R19.1 U5.12 X1.3 | length 11.6
  SIG/PWR1 w0.171: U5.12@135.018,134.235 137.664,136.881 138.328,136.881 138.949,137.501 R19.1@138.953,137.501 139.424,137.973 140.284,137.973 141.36,139.048 141.697,139.048 141.868,138.877 X1.3@142.596,138.877 143.144,138.877 C23.2@144.14,139.872
STM_RST: C24.2 P3.18 R20.1 SW1.2 TP1.1 U5.14 | length 48.8
  SIG/PWR1 w0.171: U5.14@134.311,134.942 136.728,137.359 136.728,138.497 141.436,143.205 141.848,143.205 ; C24.2@142.311,142.743 141.848,143.205 ; R20.1@145.273,143.169 145.273,143.445 146.177,144.348 ; SW1.2@160.477,154.102 160.503,154.076 160.528,154.076 SW1.2@160.528,153.924 ; v1(161.646,153.314) 161.53,153.314 161.419,153.425 161.027,153.425 SW1.2@160.528,153.924 ; 141.848,143.205 141.848,143.652 143.205,145.009 145.517,145.009 146.177,144.348 ; 146.177,144.348 157.321,144.348 157.683,144.711 P3.18@157.683,145.517 160.249,145.517 160.528,145.796 SW1.2@160.528,153.924
  SIG/PWR2 w0.171: TP1.1@161.442,157.455 161.564,157.333 161.564,153.396 v1(161.646,153.314)
SVREF: C79.1 C80.2 R60.1 R63.2 U11.33 | length 8.5
  SIG/PWR1 w0.2: U11.33@136.143,168.111 136.143,170.207
  SIG/PWR1 w0.6: C79.1@135.293,172.986 R60.1@135.293,171.374 135.418,171.249 135.418,170.932 136.143,170.207 ; C79.1@135.293,173.012 135.293,174.549 R63.2@135.369,174.625 135.293,174.701 C80.2@135.293,176.212
SWCLK: P2.2 R15.2 U5.76 | length 14.5
  SIG/PWR1 w0.171: U5.76@130.421,119.385 132.942,116.865 133.528,116.865 135.073,115.321 136.952,115.321 137.617,114.656 137.617,114.097 138.164,113.55 R15.2@138.786,113.55 P2.2@138.786,110.16
SWDIO: P2.4 R16.2 U5.72 | length 17
  SIG/PWR1 w0.171: U5.72@126.886,120.446 127.442,121.002 127.505,121.002 127.584,121.081 127.915,121.081 128.778,120.218 128.778,117.602 130.581,115.799 130.581,113.511 130.606,113.487 ; R16.2@129.616,113.487 130.606,113.487 ; P2.4@133.706,109.576 133.706,111.709 132.766,112.649 131.444,112.649 130.606,113.487
SWO: P2.3 R14.2 U5.89 | length 21.2
  SIG/PWR1 w0.171: U5.89@135.018,123.982 134.337,124.663 133.782,124.663 130.57,121.451 130.57,120.719 129.646,119.795 129.646,119.598 130.57,118.675 130.57,118.223 132.715,116.078 133.553,116.078 134.214,115.418 134.214,114.656 135.664,113.205 136.032,113.205 136.246,112.992 P2.3@136.246,110.16
TEST: R17.2 U5.67 | length 15.8
  SIG/PWR1 w0.171: U5.67@125.118,122.214 125.816,122.912 125.816,123.123 126.746,124.054 129.286,124.054 130.247,123.093 130.247,120.852 129.323,119.929 129.323,119.464 130.247,118.541 130.247,117.353 131.61,115.989 R17.2@131.61,115.062
TX: TP23.1 U5.68 U11.41 | length 130.9
  SIG/PWR1 w0.171: v1(103.175,178.486) 104.115,179.426 123.927,179.426 v1(124.714,178.638) ; v1(105.842,128.499) 105.928,128.499 106.156,128.727 113.005,128.727 113.538,129.261 v1(113.538,129.362) ; U5.68@125.472,121.86 125.533,121.86 126.71,123.038 v1(126.771,123.038) ; U11.41@132.943,168.111 132.943,168.979 133.272,169.308 v1(133.272,169.33)
  SIG/PWR2 w0.171: v1(103.175,178.486) 103.175,178.4 102.819,178.044 102.819,131.521 v1(105.842,128.499) ; v1(113.538,129.362) 120.523,122.377 126.105,122.377 126.766,123.038 v1(126.771,123.038) ; v1(124.714,178.638) 124.83,178.638 127.472,181.28 TP23.1@127.914,181.28 ; v1@124.774,178.578 124.774,177.383 124.358,176.967 124.358,168.783 128.041,165.1 133.325,165.1 134.061,165.837 134.061,166.97 133.272,167.76 v1(133.272,169.33)
USB1_N: U5.70 U8.6 | length 10.6
  SIG/PWR1 w0.2: U8.6@118.369,115.76 118.561,115.952 118.561,116.351 119.101,116.891 119.101,117.526 120.012,118.437 121.285,118.437 123.2,120.352 125.378,120.352 U5.70@126.179,121.153
USB1_P: U5.71 U8.4 | length 10.7
  SIG/PWR1 w0.2: U8.4@120.269,115.76 120.089,115.94 120.089,116.804 119.996,116.897 119.844,116.897 119.776,116.829 119.631,116.829 119.475,116.984 119.475,117.371 120.167,118.062 121.441,118.062 123.355,119.977 125.71,119.977 U5.71@126.532,120.8
USB2_N: U9.6 U11.68 | length 20.5
  SIG/PWR1 w0.2: U9.6@115.329,158.786 115.538,158.786 116.23,158.093 116.23,157.353 118.618,154.965 129.228,154.965 132.143,157.88 U11.68@132.143,158.361
USB2_P: U9.4 U11.69 | length 20.6
  SIG/PWR1 w0.2: U9.4@115.329,156.886 115.42,156.795 116.078,156.795 116.281,156.591 116.281,156.47 116.281,156.413 116.176,156.308 116.176,156.163 116.319,156.019 116.464,156.019 116.57,156.125 116.849,156.125 118.344,154.63 118.388,154.63 118.452,154.565 129.394,154.565 132.543,157.714 U11.69@132.543,158.361
VBAT: P1.2 Q2.3 R3.2
VBATRTC: C27.2 TP2.1 U5.6 U6.3 | length 66.1
  SIG/PWR1 w0.308: U5.6@137.139,132.113 138.041,133.015 v1(139.167,133.015)
  SIG/PWR1 w0.5: v1(155.016,151.841) 155.778,151.841 159.203,155.266 161.279,155.266 162.15,154.395 171.362,154.395 v1(171.374,154.407) ; v1(171.374,160.172) 171.386,160.185 173.19,160.185 U6.3@173.203,160.198
  SIG/PWR2 w0.5: v1(139.167,133.015) 141.448,130.734 150.241,130.734 155.016,135.509 v1(155.016,151.841) ; TP2.1@170.358,162.611 170.358,162.205 171.355,161.208 171.355,160.192 v1(171.374,160.172) v1(171.374,154.407)
VDDA: C25.2 C26.2 R22.2 R23.1 U5.19 U5.22 | length 21
  SIG/PWR1 w0.254: U5.22@131.482,137.77 131.482,137.724 130.937,137.178 130.937,136.754 131.547,136.144 131.977,136.144 U5.19@132.543,136.71 ; U5.22@131.482,137.782 132.03,138.329 132.03,138.76 131.47,139.319 131.47,141.935 R23.1@132.065,142.53 ; U5.19@132.543,136.71 133.604,137.77 133.604,138.963 134.442,139.802 134.442,140.27 134.457,140.284 ; C26.2@133.903,140.838 134.457,140.284 ; R22.2@138.212,145.223 C25.2@137.064,144.074 137.064,144.013 137.439,143.637 137.439,142.824 134.899,140.284 134.457,140.284
VLED+: C59.2 LCD1.1 LCD1.2 R5.1 U2.4 | length 5.5
  SIG/PWR1 w0.712: C59.2@138.582,185.166 138.582,186.754 139.153,187.325 LCD1.1@140.053,187.325 ; 140.31,186.487 140.31,188.697
VLED-: C59.1 L2.2 LCD1.3 LCD1.4 | length 3.5
  SIG/PWR1 w0.712: C59.1@140.106,185.166 140.106,185.245 140.484,185.623 140.72,185.623 141.3,186.203 141.3,187.985
VREF+: R23.2 R24.2 U5.21 | length 9.2
  SIG/PWR1 w0.254: U5.21@131.836,137.417 132.563,138.143 132.563,139.319 132.029,139.852 132.029,141.249 133.678,142.899 133.678,143.109 R23.2@133.161,143.626 133.187,143.626 R24.2@134.301,144.74
VREF-: C25.1 C26.1 R24.1 R25.2 U5.20 | length 7.6
  SIG/PWR1 w0.254: U5.20@132.189,137.063 133.096,137.97 133.096,139.675 132.613,140.157 132.613,141.008 133.96,142.354 134.255,142.354 134.694,141.915 C26.1@134.981,141.915
Vsupply: C4.1 C29.2 C30.2 C35.2 C36.2 L6.1 Q1.2 Q2.2 R26.1 TP7.1 U1.4 U1.5 U7.8 U7.9 U7.12 U7.16 U7.20 U7.21 U7.22 | length 26.8
  SIG/PWR1 w0.4: v1(175.133,139.294) 175.187,139.294 175.295,139.401 U7.12@176.801,139.401 ; U7.16@182.601,138.751 183.657,138.751 v1(184.196,138.211)
  SIG/PWR1 w0.5: U1.4@188.709,113.566 U1.5@188.709,114.516 ; R26.1@190.487,150.317 190.487,149.035 191.897,147.625 198.03,147.625 198.323,147.332 198.323,143.984
  SIG/PWR2 w0.5: v1(175.133,139.294) 175.133,139.321 175.23,139.418 v1(175.23,141.666) ; v1(184.171,142.478) v1(184.171,141.158) 184.184,141.145 184.184,138.224 v1(184.196,138.211) ; TP7.1@195.275,124.866 195.288,124.854 195.288,122.441 v1(195.301,122.428)
  other v1: 173.808,141.64
X+: LCD2.3 U11.63 | length 106.4
  SIG/PWR1 w0.171: v1(129.006,159.918) 129.101,159.918 129.419,160.236 U11.63@131.068,160.236 ; v1(177.343,188.824) 178.363,189.844 LCD2.3@178.363,192.444
  SIG/PWR2 w0.171: v1(129.006,159.918) 128.118,159.918 127.635,160.401 127.635,160.858 123.419,165.075 123.419,195.097 125.197,196.875 172.085,196.875 174.549,194.412 174.549,188.519 175.108,187.96 176.479,187.96 v1(177.343,188.824)
X-: LCD2.1 U11.64 | length 106.3
  SIG/PWR1 w0.171: v1(129.006,159.055) 129.088,159.137 129.495,159.137 130.189,159.831 131.062,159.831 U11.64@131.068,159.836 ; v1(175.514,188.9) 176.327,189.713 176.327,192.408 LCD2.1@176.363,192.444
  SIG/PWR2 w0.171: v1(129.006,159.055) 128.041,159.055 127.305,159.791 127.305,160.721 122.834,165.192 122.834,195.59 124.704,197.46 172.644,197.46 175.514,194.589 v1(175.514,188.9)
Y+: LCD2.4 U11.65 | length 111.8
  SIG/PWR1 w0.171: v1(129.006,158.191) 129.776,158.191 130.164,158.58 130.164,159.127 130.474,159.436 U11.65@131.068,159.436 ; v1(179.349,190.576) 179.349,192.431 LCD2.4@179.363,192.444
  SIG/PWR2 w0.171: v1(129.006,158.191) 127.457,158.191 126.975,158.674 126.975,160.585 122.149,165.411 122.149,195.758 124.46,198.069 174.041,198.069 176.327,195.783 176.327,190.144 176.86,189.611 178.918,189.611 179.326,190.019 179.326,190.553 v1(179.349,190.576)
Y-: LCD2.2 U11.66 | length 111.5
  SIG/PWR1 w0.171: v1(129.032,157.328) 129.616,157.328 131.068,158.779 U11.66@131.068,159.036 ; v1(177.343,190.551) 177.343,192.424 LCD2.2@177.363,192.444
  SIG/PWR2 w0.171: v1(129.032,157.328) 127.279,157.328 126.651,157.956 126.651,160.451 121.498,165.604 121.498,196.022 124.181,198.704 175.26,198.704 177.216,196.748 177.216,196.698 177.343,196.571 v1(177.343,190.551)
pads on no net: BAT1. LCD1.45 LCD1.49 LCD1.50 U7.19 U11.37 U11.38 U11.39 U11.40 U11.72 U11.75 U11.76 U11.77 U11.78 U11.84 U11.85 U11.86 U11.87 USB1.A8 USB1.B8 USB2.A8 USB2.B8

## Polygon pours and split planes (outlines as drawn)
GND on SIG/PWR2 "GND_L04_P124" (solid, remove dead copper, pour order 124): 100,200 100,100 200,100 200,200